# EAGLE board Frantic Uusam-Kieran (EAGLE 9.7.0)

Size 94.27 x 152.67 mm. Coordinates in mm from the lower left corner, seen from the top.
Outline: 0,0 94.27,0 94.27,152.67 0,152.67 0,0
Copper layers (1*16): Top 0.035mm / dielectric 1.5mm / Bottom 0.035mm
Design rules "default": minimum track width 6mil, minimum drill 0.35mm, track to track 6mil, track to pad 6mil, pad to pad 6mil, via to via 6mil, smd to smd 6mil, copper to edge 40mil, drill to drill 6mil, minimum pad ring 10mil, minimum via ring 8mil, stop-mask expansion 4mil, vias tented up to drill 0mil, thermal gap 10mil

## Footprints (pad centres in the part's own frame; a part is rotated, then mirrored left to right if it is on the bottom)
LEDRD254W60D565H860B = drill 0.981 pad 1.581: 1 -1.27,0; 2 1.27,0
RESAD1016W63L850D250B = drill 0.83 pad 1.43: 1 -5.08,0; 2 5.08,0
SWITCH-MOMENTARY-PTH-6.5MM = drill 1.016 pad 1.88: 1 -3.251,2.261; 2 3.251,2.261; 3 -3.251,-2.261; 4 3.251,-2.261
DIP762W53P254L1969H508Q14B = drill 0.743 pad 1.343: 1 -3.81,7.62; 2 -3.81,5.08; 3 -3.81,2.54; 4 -3.81,0; 5 -3.81,-2.54; 6 -3.81,-5.08; 7 -3.81,-7.62; 8 3.81,-7.62; 9 3.81,-5.08; 10 3.81,-2.54; 11 3.81,0; 12 3.81,2.54; 13 3.81,5.08; 14 3.81,7.62
ARDUINO-UNO-R3-SHIELD = drill 1.016 pad 1.88: 3.3V 24.13,-2.54; 5V 24.13,0; A0 24.13,12.7; A1 24.13,15.24; A2 24.13,17.78; A3 24.13,20.32; A4 24.13,22.86; A5 24.13,25.4; AREF -24.13,-13.97; D2 -24.13,20.32; D3 -24.13,17.78; D4 -24.13,15.24; D5 -24.13,12.7; D6 -24.13,10.16; D7 -24.13,7.62; D8 -24.13,3.81; D9 -24.13,1.27; D10 -24.13,-1.27; D11 -24.13,-3.81; D12 -24.13,-6.35; D13 -24.13,-8.89; GND@0 24.13,2.54; GND@1 24.13,5.08; GND@2 -24.13,-11.43; IOREF 24.13,-7.62; NC 24.13,-10.16; RES 24.13,-5.08; RX -24.13,25.4; SCL -24.13,-19.05; SDA -24.13,-16.51; TX -24.13,22.86; VIN 24.13,7.62

## Placement (x,y rotation side)
D1  RED  [LEDRD254W60D565H860B]  73.32,12.78 270 top
R1  330  [RESAD1016W63L850D250B]  73.32,26.75 90 top
R2  10k  [RESAD1016W63L850D250B]  83.48,8.97 90 top
R3  2.2k  [RESAD1016W63L850D250B]  63.16,47.07 90 top
R4  2.2k  [RESAD1016W63L850D250B]  35.22,8.97 90 top
R5  2.2k  [RESAD1016W63L850D250B]  37.76,47.07 90 top
R6  2.2k  [RESAD1016W63L850D250B]  35.22,47.07 90 top
S1  SWITCH_MOMENTARY  [SWITCH-MOMENTARY-PTH-6.5MM]  86.02,28.02 90 top
S2  SWITCH_MOMENTARY  [SWITCH-MOMENTARY-PTH-6.5MM]  60.62,28.02 270 top
U1  74HC00_PDIP  [DIP762W53P254L1969H508Q14B]  30.14,28.02 270 top
U2  ARDUINO-UNO-R3-SHIELD  [ARDUINO-UNO-R3-SHIELD]  47.88,122.83 270 top

## Library data of the parts
D1 = Tinkercad; CATEGORY: Opto-Electronic; SUB-CATEGORY: LED; VALUE: LED_RED
R1-R6 S1 S2 U1 U2 = Tinkercad

## Nets
D1_A: D1.1 R1.1
U1_2A: U1.4 U1.8
U1_2B: U1.5 U1.11
U1_3A: R3.1 S2.1 S2.2 U1.9 U1.10
U2_5V: R2.1 R4.1 R5.1 R6.1 S2.3 S2.4 U1.1 U1.2 U1.14 U2.5V
U2_D2: U1.6 U2.D2
U2_D3: U1.3 U2.D3
U2_D12: R2.2 S1.1 S1.2 U2.D12
U2_D13: R1.2 U2.D13
U2_GND: D1.2 R3.2 R4.2 R5.2 R6.2 S1.3 S1.4 U1.7 U1.12 U1.13 U2.GND@0 U2.GND@1 U2.GND@2

## Tracks (layer width: path | path; a pad name or v marks a point on that pad's centre or on a via)
D1_A  (1 unrouted)
U1_2A  (1 unrouted)
U1_2B  (1 unrouted)
U1_3A  (4 unrouted)
U2_5V  (9 unrouted)
U2_D2  (1 unrouted)
U2_D3  (1 unrouted)
U2_D12  (3 unrouted)
U2_D13  (1 unrouted)
U2_GND  (12 unrouted)